# EAGLE board ECEN2270-Final Project (EAGLE 9.3.2)
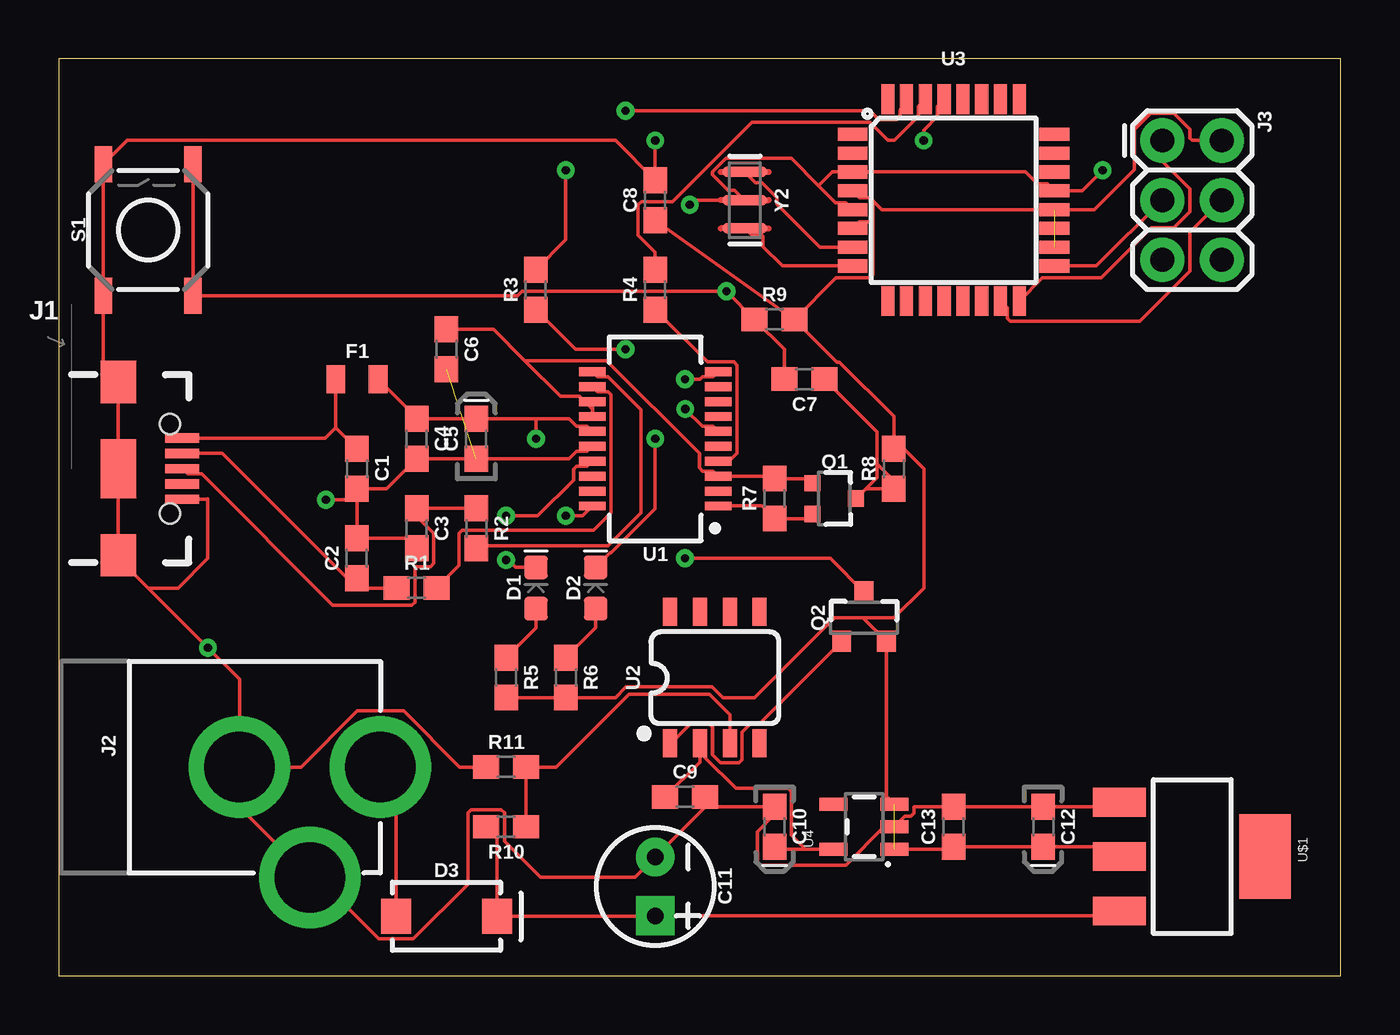
[diagram p0: board, top side]
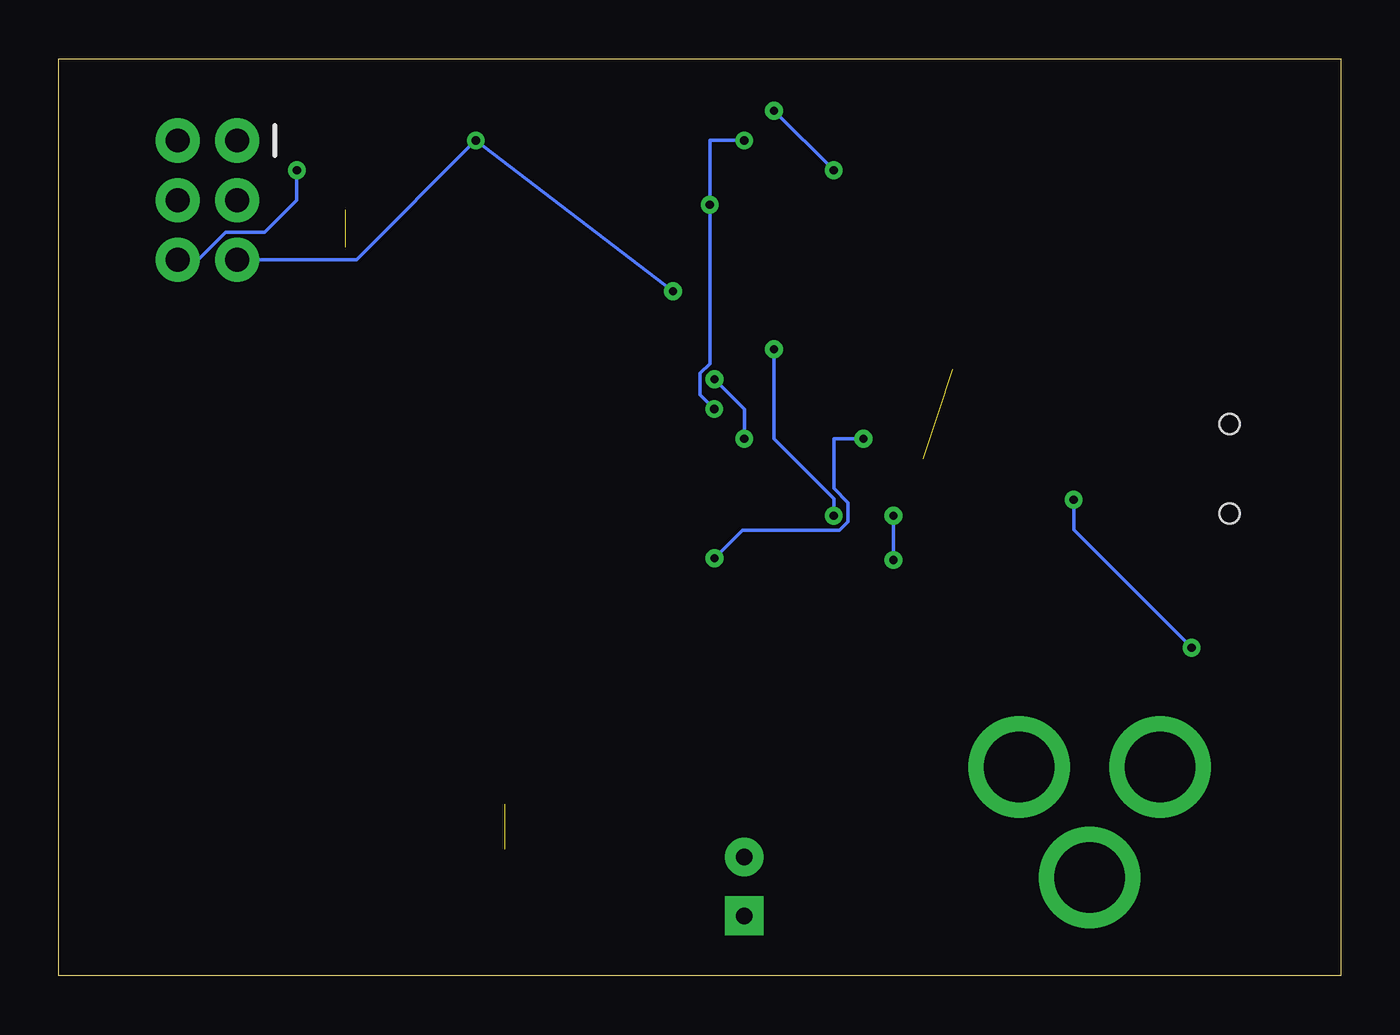
[diagram p1: board, bottom side, seen from below]

Size 54.59 x 39.04 mm. Coordinates in mm from the lower left corner, seen from the top.
Outline: 0,0 54.59,0 54.59,39.04 0,39.04 0,0
Copper layers (1*16): Top 0.035mm / dielectric 1.5mm / Bottom 0.035mm
Design rules "default": minimum track width 6mil, minimum drill 0.35mm, track to track 6mil, track to pad 6mil, pad to pad 6mil, via to via 6mil, smd to smd 6mil, copper to edge 40mil, drill to drill 6mil, minimum pad ring 10mil, minimum via ring 8mil, stop-mask expansion 4mil, vias tented up to drill 0mil, thermal gap 10mil

## Footprints (pad centres in the part's own frame; a part is rotated, then mirrored left to right if it is on the bottom)
0603 = smd 1.1 x 1: 1 -0.85,0; 2 0.85,0
0603-POLAR = smd 1.1 x 1: + 0.85,0; - -0.85,0
CPOL-RADIAL-2.5MM-5MM = drill 0.7 pad 1.651 square: 1 1.25,0 | drill 0.7 pad 1.651: 2 -1.25,0
LED-0603 = smd 1 x 1: A -0.877,0; C 0.877,0
SMA-DIODE = smd 1.27 x 1.47: A -2.15,0; C 2.15,0
0805 = smd 0.8 x 1.2: 1 -0.9,0; 2 0.9,0
USB-B-MICRO-SMD = smd 1.45 x 0.4: D+ 2.725,0; D- 2.725,0.65; GND 2.725,-1.3; ID 2.725,-0.65; VBUS 2.725,1.3 | smd 1.5 x 1.8: SHIELD1 0,3.685; SHIELD2 0,-3.685 | smd 1.5 x 2.5: SHIELD3 0,0 | hole 0.85: 2.2,1.9; 2.2,-1.9
POWER_JACK_PTH = drill 2.997 pad 4.318: GND 0,7.7; GNDBREAK 4.7,10.7; PWR 0,13.7
2X3 = drill 1.016 pad 1.88: 1 0,0; 2 0,2.54; 3 2.54,0; 4 2.54,2.54; 5 5.08,0; 6 5.08,2.54
SOT323 = smd 0.7 x 0.7: 1 -0.65,-0.925; 2 0.65,-0.925; 3 0,0.925
SOT23-3 = smd 0.8 x 0.9: 1 -0.95,-1; 2 0.95,-1; 3 0,1.1
TACTILE_SWITCH_SMD_5.2MM = smd 1.524 x 0.762: 1 -2.794,1.905; 2 2.794,1.905; 3 -2.794,-1.905; 4 2.794,-1.905
SSOP20_L = smd 0.381 x 1.143: 1 -2.857,-2.68; 2 -2.223,-2.68; 3 -1.587,-2.68; 4 -0.953,-2.68; 5 -0.318,-2.68; 6 0.318,-2.68; 7 0.953,-2.68; 8 1.587,-2.68; 9 2.223,-2.68; 10 2.857,-2.68; 11 2.857,2.68; 12 2.223,2.68; 13 1.587,2.68; 14 0.953,2.68; 15 0.318,2.68; 16 -0.318,2.68; 17 -0.953,2.68; 18 -1.587,2.68; 19 -2.223,2.68; 20 -2.857,2.68
SO08 = smd 0.6 x 1.2: 1 -1.905,-2.8; 2 -0.635,-2.8; 3 0.635,-2.8; 4 1.905,-2.8; 5 1.905,2.8; 6 0.635,2.8; 7 -0.635,2.8; 8 -1.905,2.8
TQFP32-08 = smd 1.27 x 0.559: 1 -4.293,2.8; 2 -4.293,2; 3 -4.293,1.2; 4 -4.293,0.4; 5 -4.293,-0.4; 6 -4.293,-1.2; 7 -4.293,-2; 8 -4.293,-2.8; 17 4.293,-2.8; 18 4.293,-2; 19 4.293,-1.2; 20 4.293,-0.4; 21 4.293,0.4; 22 4.293,1.2; 23 4.293,2; 24 4.293,2.8 | smd 0.559 x 1.27: 9 -2.8,-4.293; 10 -2,-4.293; 11 -1.2,-4.293; 12 -0.4,-4.293; 13 0.4,-4.293; 14 1.2,-4.293; 15 2,-4.293; 16 2.8,-4.293; 25 2.8,4.293; 26 2,4.293; 27 1.2,4.293; 28 0.4,4.293; 29 -0.4,4.293; 30 -1.2,4.293; 31 -2,4.293; 32 -2.8,4.293
SOT23-5 = smd 0.55 x 1.2: 1 -0.95,-1.3; 2 0,-1.3; 3 0.95,-1.3; 4 0.95,1.3; 5 -0.95,1.3
SOT223 = smd 1.219 x 2.235: 1 -2.311,-3.099; 2 0,-3.099; 3 2.311,-3.099 | smd 3.6 x 2.2: 4 0,3.099
RESONATOR-SMD-3.2X1.3 = smd 0.45 x 1.905: 1 -1.2,0; 2 0,0; 3 1.2,0

## Placement (x,y rotation side)
C1  0.1uF  [0603]  12.7,21.59 270 top
C2  47pF  [0603]  12.7,17.78 90 top
C3  47pF  [0603]  15.24,19.05 270 top
C4  0.1uF  [0603]  15.24,22.86 270 top
C5  10uF  [0603-POLAR]  17.78,22.86 90 top
C6  0.1uF  [0603]  16.51,26.67 270 top
C7  0.1uF  [0603]  31.75,25.4 180 top
C8  0.1uF  [0603]  25.4,33.02 90 top
C9  1.0uF  [0603]  26.67,7.62 0 top
C10  10uF  [0603-POLAR]  30.48,6.35 270 top
C11  47uF  [CPOL-RADIAL-2.5MM-5MM]  25.4,3.81 270 top
C12  10uF  [0603-POLAR]  41.91,6.35 270 top
C13  0.1uF  [0603]  38.1,6.35 90 top
D1  BLUE  [LED-0603]  20.32,16.51 90 top
D2  GREEN  [LED-0603]  22.86,16.51 90 top
D3  1A/40V/500mV  [SMA-DIODE]  16.51,2.54 0 top
F1  6V 0.5A  [0805]  12.7,25.4 0 top
FRAME1  FRAME-LETTERNO_PACKAGE  [DUMMY]  0,-3.81 0 top  (outside the outline)
J1  [USB-B-MICRO-SMD]  2.54,21.59 0 top
J2  POWER_JACK  [POWER_JACK_PTH]  0,8.89 270 top
J3  [2X3]  46.99,35.56 270 top
Q1  310mA/60V/1.6Ω  [SOT323]  33.02,20.32 270 top
Q2  2.5A/30V/105mΩ  [SOT23-3]  34.29,15.24 0 top
R1  27  [0603]  15.24,16.51 0 top
R2  27  [0603]  17.78,19.05 270 top
R3  1k  [0603]  20.32,29.21 90 top
R4  1k  [0603]  25.4,29.21 90 top
R5  1k  [0603]  19.05,12.7 270 top
R6  1k  [0603]  21.59,12.7 270 top
R7  1k  [0603]  30.48,20.32 90 top
R8  10k  [0603]  35.56,21.59 90 top
R9  10k  [0603]  30.48,27.94 0 top
R10  10k  [0603]  19.05,6.35 180 top
R11  10k  [0603]  19.05,8.89 0 top
S1  [TACTILE_SWITCH_SMD_5.2MM]  3.81,31.75 90 top
U1  FT231XS  [SSOP20_L]  25.4,22.86 90 top
U2  LMV358  [SO08]  27.94,12.7 0 top
U3  ATMEGA328P_TQFP  [TQFP32-08]  38.1,33.02 0 top
U4  3.3V/150mA  [SOT23-5]  34.29,6.35 90 top
U$1  V_REG_LD1117VXXLD1117-SMD  [SOT223]  48.26,5.08 270 top
Y2  16MHz  [RESONATOR-SMD-3.2X1.3]  29.21,33.02 270 top

## Library data of the parts
C1 = SparkFun-Capacitors; PROD_ID: CAP-08390
C2 C3 = SparkFun-Capacitors; PROD_ID: CAP-08913
C4 C6-C8 = SparkFun-Capacitors; PROD_ID: CAP-08604
C5 C10 C12 = SparkFun-Capacitors; PROD_ID: CAP-13210
C9 = SparkFun-Capacitors; PROD_ID: CAP-00868
C11 = SparkFun-Capacitors; PROD_ID: CAP-08440
C13 = SparkFun-Capacitors; PROD_ID: CAP-00810
D1 = SparkFun-LED; PROD_ID: DIO-08575
D2 = SparkFun-LED; PROD_ID: DIO-00821
D3 = SparkFun-DiscreteSemi; PROD_ID: DIO-08053
F1 = SparkFun-Fuses; PROD_ID: 13945
FRAME1 = SparkFun-Aesthetics; DESIGNER: Nobody; VERSION: v01
J1 = SparkFun-Connectors; PROD_ID: CONN-11752
J2 = SparkFun-Connectors; PROD_ID: CONN-08197
J3 = SparkFun-Connectors; PROD_ID: CONN-09701
Q1 = SparkFun-DiscreteSemi; PROD_ID: TRANS-11151
Q2 = SparkFun-DiscreteSemi; PROD_ID: TRANS-11308
R1 R2 = SparkFun-Resistors; PROD_ID: RES-09334
R3-R7 = SparkFun-Resistors; PROD_ID: RES-07856
R8-R11 = SparkFun-Resistors; PROD_ID: RES-00824
S1 = SparkFun-Switches; PROD_ID: SWCH-14139
U1 = SparkFun-IC-Comms; PROD_ID: IC-11524
U2 = SparkFun-IC-Amplifiers; PROD_ID: IC-09657
U3 = SparkFun-IC-Microcontroller; PROD_ID: IC-09069
U4 = SparkFun-IC-Power; PROD_ID: VREG-00822
U$1 = SparkFun-IC-Power; PROD_ID: VREG-13917
Y2 = SparkFun-Clocks; PROD_ID: XTAL-08900

## Nets
3.3V: C9.1 C10.+ U2.2 U4.5
3.3V_F: C6.1 Q1.1 R7.2 U1.3 U1.13 U1.14
5V: C8.1 C12.+ C13.1 J3.2 Q2.2 R5.2 R6.2 R8.2 R9.2 U3.4 U3.6 U3.18 U3.20 U4.1 U4.3 U$1.2
DTR: C7.1 Q1.3 R8.1
GND: C1.2 C2.2 C3.2 C4.2 C5.- C6.2 C8.2 C9.2 C10.- C11.2 C12.- C13.2 J1.GND J1.SHIELD1 J1.SHIELD2 J1.SHIELD3 J2.GND J2.GNDBREAK J3.6 R11.1 S1.1 S1.2 U1.6 U1.16 U3.3 U3.5 U3.21 U4.2 U$1.1 Y2.2
MISO: J3.1 U3.16
MOSI: J3.4 U3.15
N$1: C1.1 F1.1 J1.VBUS
N$2: C2.1 J1.D- R1.1
N$3: R1.2 U1.12
N$4: C3.1 J1.D+ R2.1
N$5: R2.2 U1.11
N$6: R3.1 U1.20
N$7: R4.1 U1.4
N$8: D1.C U1.17
N$9: D2.C U1.10
N$10: D1.A R5.1
N$11: D2.A R6.1
N$12: Q1.2 R7.1 U1.1
N$13: U3.7 Y2.1
N$14: U3.8 Y2.3
N$15: R10.1 R11.2 U2.3
N$16: Q2.1 U2.1
N$17: D3.A J2.PWR
RESET: C7.2 J3.5 R9.1 S1.3 S1.4 U3.29
SCK: J3.3 U3.17
USB_RX: R3.2 U3.31
USB_TX: R4.2 U3.30
USB_VCC: C4.1 C5.+ F1.2 Q2.3 U1.15
VIN: C11.1 D3.C R10.2 U$1.3

## Tracks (layer width: path | path; a pad name or v marks a point on that pad's centre or on a via)
3.3V
  Top 0.152: C10.+ 30.58,5.4 U4.5 31.8,5.4 31.21,6 31.21,7.84 31.07,7.98 28.84,7.98 27.53,9.29 27.53,9.68 U2.2 27.3,9.11 C9.1
3.3V_F
  Top 0.152: U1.14 22.72,24.13 | 22.72,24.13 U1.13 | 22.72,24.13 22.19,24.66 21.37,24.66 19.84,26.19 | C6.1 18.52,27.52 19.84,26.19 | 19.84,26.19 23.33,26.19 27.28,22.24 27.28,21.62 27.41,21.49 27.86,21.49 U1.3 30.38,21.27 R7.2 31.89,21.17 Q1.1
5V  (2 unrouted)
  Top 0.152: U4.1 38,5.4 C13.1 C12.+ 44.74,5.5 U$1.2 | R5.2 R6.2 23.7,11.85 24.15,12.3 27.83,12.3 28.28,11.85 29.63,11.85 33.02,15.24 34.24,15.24 | U4.3 35.24,7.65 Q2.2 34.24,15.24 | R9.2 33.14,26.13 33.24,26.13 35.56,23.81 35.56,22.86 | 35.56,22.86 R8.2 | 34.24,15.24 35.56,15.24 36.83,16.51 36.83,21.59 35.56,22.86 | C8.1 R9.2 | R9.2 31.75,28.36 | 34.67,32.25 34.54,32.11 34.1,32.11 U3.6 | 34.67,32.25 34.67,32.99 | 34.67,32.99 34.54,33.13 34.1,33.13 U3.4 | 34.67,32.99 35.05,32.62 U3.20 44.1,32.62 44.48,32.99 45.8,34.32 45.8,36.02 46.51,36.73 47.47,36.73 48.16,36.04 48.16,35.66 48.26,35.56 J3.2 | R9.2 33.1,29.71 34.54,29.71 34.67,29.85 34.67,32.25
DTR
  Top 0.152: C7.1 34.83,23.17 34.83,21.8 | 34.83,21.8 35.56,21.07 R8.1 34.37,20.74 | Q1.3 34.37,20.74 | 34.37,20.74 34.83,21.21 34.83,21.8
GND  (via drill 0.35)  (1 unrouted)
  Top 0.152: J2.GND 7.7,7.19 J2.GNDBREAK 11.02,4.19 13.63,1.58 15.09,1.58 17.42,3.91 17.42,6.95 17.55,7.08 18.84,7.08 18.98,6.95 18.98,5.73 20.52,4.19 24.53,4.19 C11.2 27.52,7.18 C9.2 27.94,7.2 C10.- 30.48,6.87 29.75,6.14 29.75,4.86 29.89,4.72 33.51,4.72 35.14,6.35 U4.2 36.04,6.8 36.28,6.8 36.42,6.93 36.42,7.18 36.44,7.2 C13.2 C12.- 44.97,7.2 U$1.1 | 5.36,20.31 J1.GND 6.32,20.29 6.35,20.32 6.35,17.78 5.08,16.51 3.81,16.51 | 12.7,20.32 C1.2 13.97,20.74 C4.2 C5.- 21.74,22.01 22.05,22.33 22.5,22.33 U1.16 | 12.7,20.32 C2.2 14.81,18.63 C3.2 | 16.1,26.23 C6.2 | J2.GND 10.32,8.89 12.71,11.28 14.69,11.28 17.08,8.89 R11.1 | U3.5 33.52,32.91 33.08,32.91 32.36,33.63 | 32.36,33.63 31.19,34.8 28.42,34.8 27.84,34.22 27.84,34.1 28.49,33.45 28.78,33.45 Y2.2 26.87,33.02 v26.87,32.82 | 32.36,33.63 32.95,34.22 U3.3 41.16,34.22 41.66,33.71 42.1,33.71 U3.21 43.58,33.42 v44.45,34.29 | U1.6 27.86,23.39 27.41,23.39 v26.68,24.13 v26.67,24.13 | v25.4,35.56 C8.2 23.71,35.56 2.92,35.56 S1.2 S1.1 1.91,25.91 J1.SHIELD1 J1.SHIELD3 J1.SHIELD2 2.54,17.78 3.81,16.51 | 3.81,16.51 v6.35,13.97 7.7,12.62 J2.GND | v11.37,20.26 12.64,20.26 12.7,20.32
  Bottom 0.152: v25.4,35.56 26.87,35.56 v26.87,32.82 26.87,26.06 27.28,25.65 27.28,24.73 v26.68,24.13 | J3.6 48.64,30.48 47.47,31.65 45.82,31.65 44.45,33.02 v44.45,34.29 | v11.37,20.26 11.37,18.99 v6.35,13.97
MISO
  Top 0.152: U3.16 41.88,29.71 44.39,29.71 46.53,31.85 47.47,31.85 48.16,32.54 48.16,33.5 46.99,34.67 J3.1
MOSI
  Top 0.152: J3.4 48.16,31.65 48.16,30 46.03,27.86 40.53,27.86 40.39,28 40.39,28.43 U3.15
N$1
  Top 0.152: F1.1 11.8,23.34 | 11.8,23.34 C1.1 | J1.VBUS 11.35,22.89 11.8,23.34
N$2
  Top 0.152: C2.1 12.91,16.72 | 12.91,16.72 13.12,16.51 R1.1 | J1.D- 6.97,22.24 12.49,16.72 12.91,16.72
N$3
  Top 0.152: R1.2 17.05,17.47 17.05,18.84 17.18,18.98 22.78,18.98 23.52,19.72 23.52,24.73 23.39,24.87 22.94,24.87 U1.12
N$4
  Top 0.152: R2.1 C3.1 15.24,19.57 15.97,18.84 15.97,17.55 15.84,17.42 15.17,17.42 15.17,15.91 15.04,15.78 11.67,15.78 6.08,21.37 6.05,21.37 5.49,21.37 J1.D+
N$5
  Top 0.152: U1.11 22.94,25.5 23.39,25.5 24.79,24.1 24.79,19.72 23.39,18.31 17.89,18.31 R2.2
N$6  (via drill 0.35)
  Top 0.152: R3.1 22.01,26.67 v24.13,26.67 | v21.59,19.59 22.3,19.59 U1.20
  Bottom 0.152: v24.13,26.67 24.13,22.86 21.59,20.32 v21.59,19.59
N$7
  Top 0.152: U1.4 28.53,21.91 28.88,22.26 28.88,26 28.75,26.14 27.62,26.14 R4.1
N$8  (via drill 0.35)
  Top 0.152: D1.C 19.44,17.39 19.05,17.78 v19.05,17.71 | v19.05,19.59 20.4,19.59 21.92,21.11 21.92,21.56 22.05,21.69 22.5,21.69 U1.17
  Bottom 0.152: v19.05,17.71 v19.05,19.59
N$9  (via drill 0.35)
  Top 0.152: D2.C 23.48,18.01 23.51,18.01 25.4,19.9 v25.4,22.86 | U1.10 27.86,25.5 27.41,25.5 27.31,25.4 v26.67,25.4
  Bottom 0.152: v26.67,25.4 25.4,24.13 v25.4,22.86
N$10
  Top 0.152: R5.1 20.32,14.82 D1.A
N$11
  Top 0.152: R6.1 22.86,14.82 D2.A
N$12
  Top 0.152: U1.1 29.95,20 R7.1 31.89,19.47 Q1.2
N$13
  Top 0.152: U3.7 32.41,31.02 30.58,32.85 30.58,33.13 29.95,33.76 29.67,33.76 Y2.1
N$14
  Top 0.152: U3.8 30.81,30.22 30,31.03 30,31.48 29.95,31.52 29.51,31.52 Y2.3
N$15
  Top 0.152: R10.1 R11.2 21.17,8.89 24.28,12 27.7,12 28.57,11.12 U2.3
N$16
  Top 0.152: Q2.1 29.83,10.73 29.45,10.73 29.1,10.38 29.1,9.21 28.97,9.07 28.18,9.07 27.83,9.42 27.83,10.6 27.7,10.73 26.91,10.73 26.08,9.9 U2.1
N$17
  Top 0.152: D3.A 14.36,8.23 J2.PWR
RESET  (via drill 0.35)
  Top 0.152: S1.4 S1.3 19.54,28.96 19.73,29.14 v28.43,29.14 R9.1 30.9,26.67 C7.2 | U3.29 37.41,37.02 37.41,36.58 36.83,36.01 v36.83,35.56
  Bottom 0.152: v28.43,29.14 v36.83,35.56 41.91,30.48 J3.5
SCK
  Top 0.152: U3.17 44.19,30.22 J3.3
USB_RX  (via drill 0.35)
  Top 0.152: R3.2 21.59,31.33 v21.59,34.29 | v24.13,36.83 34.55,36.83 34.93,36.45 35.67,36.45 35.81,36.58 35.81,36.83 U3.31
  Bottom 0.152: v21.59,34.29 v24.13,36.83
USB_TX
  Top 0.152: R4.2 25.4,30.8 24.67,31.52 24.67,32.81 24.8,32.95 26.14,32.95 29.52,36.33 34.54,36.33 35.3,35.56 35.59,35.56 36.61,36.58 36.61,37.02 U3.30
USB_VCC  (via drill 0.35)
  Top 0.152: C4.1 15.24,23.76 F1.2 15.29,23.71 C5.+ 20.32,23.71 | U1.15 22.5,23.39 22.05,23.39 21.74,23.71 20.32,23.71 | Q2.3 32.85,17.78 v26.67,17.78 | v20.32,22.86 20.32,23.71
  Bottom 0.152: v20.32,22.86 21.59,22.86 21.59,20.75 20.98,20.14 20.98,19.33 21.34,18.98 25.47,18.98 v26.67,17.78
VIN
  Top 0.152: R10.2 18.66,5.89 D3.C 25.38,2.54 C11.1 44.95,2.56 U$1.3